# Altium PCB EMG_MainBoard_Layout.PcbDoc (part 5 of 5)
Units mm, origin at the board's own origin, x right, y up, seen from the top; angles counter-clockwise.
Board outline 80 x 45 mm, 4 copper layers (L1 TOP, L2 GND, L3 POWER SIGNAL, L4 BOTTOM GND), stack 1.164 mm thick; 231 components, 136 nets, 808 pads, 48 vias.
Unrouted connection lines stored in the file: 570.
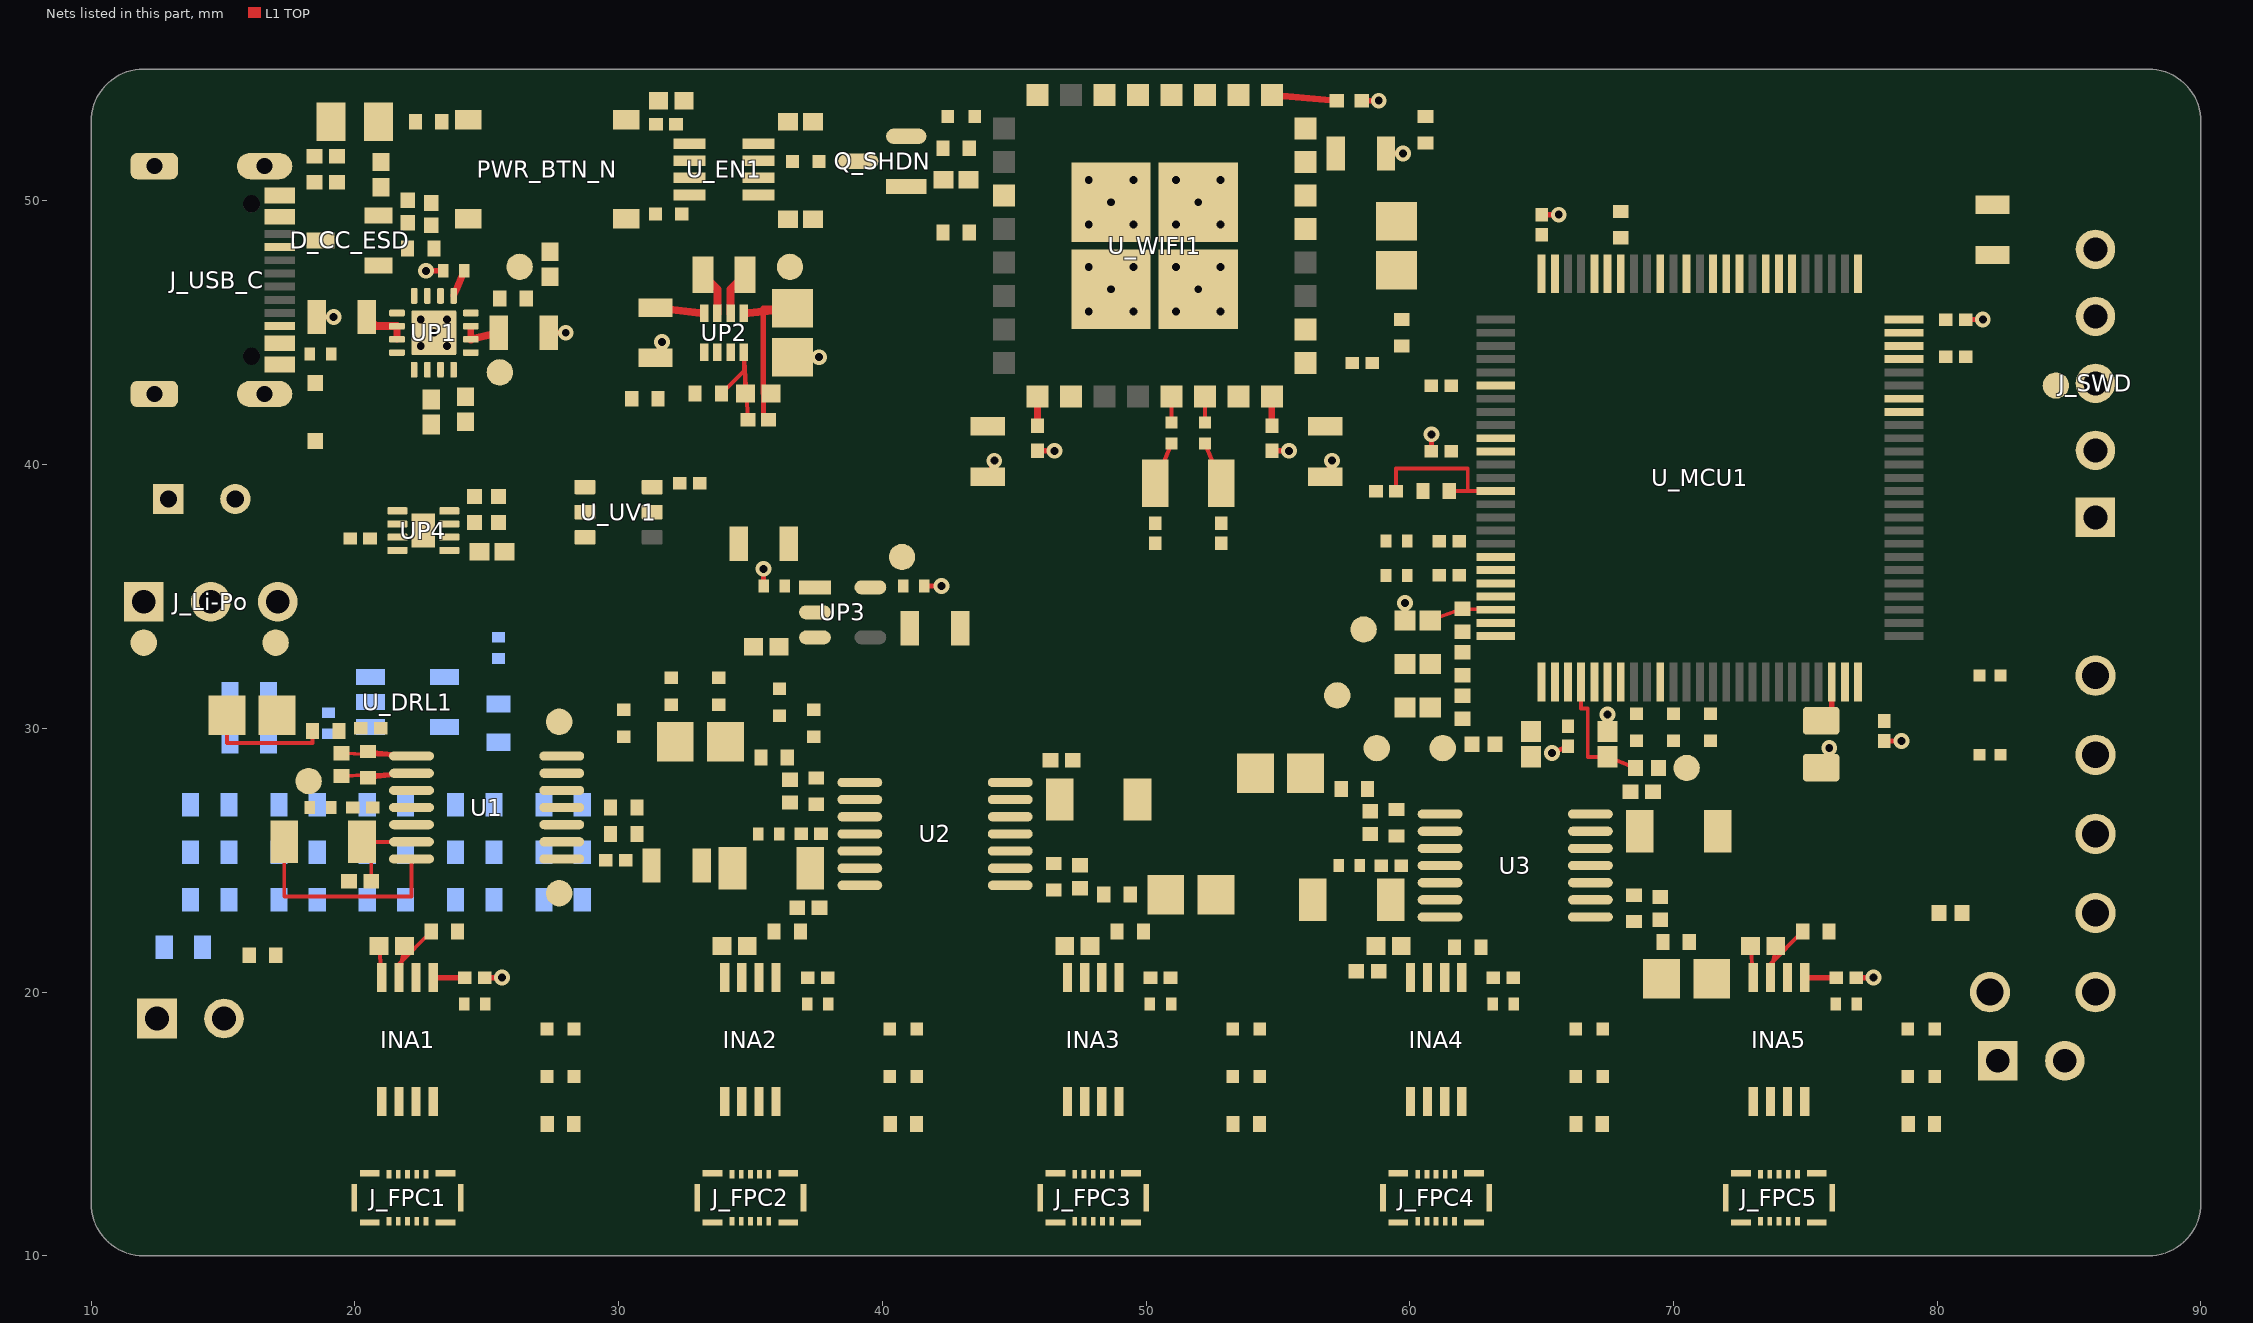
[diagram p4: the nets of this part, all layers, seen from the top]

## Via types
v1: diameter 0.6, hole 0.3, L1 TOP to L4 BOTTOM GND, 31 vias
v2: diameter 0.6, hole 0.3, L1 TOP to L4 BOTTOM GND, tented top, 12 vias
v3: diameter 0.5, hole 0.3, L1 TOP to L4 BOTTOM GND, 5 vias

## Nets (pads, with @x,y where several pads share a name; then routed paths per layer and width w, separated by ;. In a path a pad name is that pad's centre, name@x,y a point inside that pad or via, vN(x,y) a via of type N, cw(c..) or ccw(c..) an arc to the next point about the centre after c; other vN are vias at no path point) (continued)
INA_OUT_1: CL_1.2 INA1.8 RH_1.1 Rservo_1.2 | length 1.2
  L1 TOP w0.15: RH_1.1@20.921,21.75 INA1.8@21.025,20.55
INA_OUT_2: CL_2.2 INA2.8 RH_2.1 Rservo_2.2
INA_OUT_3: CL_3.2 INA3.8 RH_3.1 Rservo_3.2
INA_OUT_4: CL_4.2 INA4.8 RH_4.1 Rservo_4.2
INA_OUT_5: CL_5.2 INA5.8 RH_5.1 Rservo_5.2 | length 1.2
  L1 TOP w0.15: RH_5.1@72.921,21.75 INA5.8@73.025,20.55
KILL_CTRL: Q_SHDN.3 R_KILL_PU.1 U_EN1.8
MCU_BOOT0: R_MCU_BOOT0_PD.2 TP_MCU_BOOT0.TP U_MCU1.94
MCU_NRST: C_NRST.1 J_SWD.5 R_NRST.1 U_MCU1.14 | length 7.2
  L1 TOP w0.15: C_NRST.1@59.479,39 59.479,39.85 62.2,39.85 62.2,39 U_MCU1.14@63.262,39 R_NRST.1@61.5,39
MCU_PWR_INT_N: R_INT_PULLUP.2 U_EN1.5 U_MCU1.83
MCU_SHUTDOWN: R_SHDN_G.2 U_MCU1.86
MCU_SPI_MISO: R_SPI_MISO.2 U_MCU1.31
MCU_SPI_MOSI: R_SPI_MOSI.2 U_MCU1.32
MCU_SPI_SCK: R_SPI_SCK.2 U_MCU1.30
MCU_SWCLK: J_SWD.4 U_MCU1.76
MCU_SWDIO: J_SWD.2 U_MCU1.72
MCU_VCAP: MCU_VCAP.2 U_MCU1.48 | length 1.6
  L1 TOP w0.2: MCU_VCAP.2@75.6,30.288 76,30.688 U_MCU1.48@76,31.762
MCU_WIFI_CS: R_SPI_CS.2 U_MCU1.35
MCU_WIFI_UART_RX: R_WIFI_UART_RX_LINK.2 U_MCU1.69
MCU_WIFI_UART_TX: R_WIFI_UART_TX_LINK.2 U_MCU1.68
NetC1_EN1_2: C1_EN1.2 R_EN1_1.2 U_EN1.1
NetC2_EN1_1: C2_EN1.1 U_EN1.3
NetC3_EN1_2: C3_EN1.2 U_EN1.7
NetC_WIFI_X32_IN_2: C_WIFI_X32_IN.2 R_WIFI_X32_IN.1 X_WIFI_32K.1 | length 1.6
  L1 TOP w0.15: R_WIFI_X32_IN.1@52.235,40.8 X_WIFI_32K.1@52.85,39.3
NetC_WIFI_X32_OUT_2: C_WIFI_X32_OUT.2 R_WIFI_X32_OUT.1 X_WIFI_32K.2 | length 1.6
  L1 TOP w0.15: X_WIFI_32K.2@50.35,39.3 R_WIFI_X32_OUT.1@50.965,40.8
NetCH_1_2: CH_1.2 RG_1.1 RGN_1.2 U1.2 | length 4.3
  L1 TOP w0.15: CH_1.2@19.5,28.193 U1.2@22.15,28.3 RG_1.1@20.5,28.125
NetCH_2_2: CH_2.2 RG_2.1 RGN_2.2 U2.2
NetCH_3_2: CH_3.2 RG_3.1 RGN_3.2 U2.9
NetCH_4_2: CH_4.2 RG_4.1 RGN_4.2 U3.2
NetCH_5_2: CH_5.2 RG_5.1 RGN_5.2 U3.9
NetCL_1_1: CL_1.1 RGN_1.1 | length 4.7
  L1 TOP w0.15: CL_1.1@15.15,30.5 15.15,29.45 18.4,29.45 RGN_1.1@18.4,29.9
NetCL_2_1: CL_2.1 RGN_2.1
NetCL_3_1: CL_3.1 RGN_3.1
NetCL_4_1: CL_4.1 RGN_4.1
NetCL_5_1: CL_5.1 RGN_5.1
NetCservo_1_1: Cservo_1.1 Rservo_1.1 U1.6 | length 4.9
  L1 TOP w0.15: Cservo_1.1@20.275,25.7 U1.6@22.15,25.7 20.625,25.7 Rservo_1.1@20.625,24.2
NetCservo_2_1: Cservo_2.1 Rservo_2.1 U2.6
NetCservo_3_1: Cservo_3.1 Rservo_3.1 U2.13
NetCservo_4_1: Cservo_4.1 Rservo_4.1 U3.6
NetCservo_5_1: Cservo_5.1 Rservo_5.1 U3.13
NetCUP4_FB_1: CUP4_FB.1 RUP_3.1 RUP_4.2 UP2.8 | length 6.1
  L1 TOP w0.15: RUP_4.2@33.9,42.7 34.75,43.55 UP2.8@34.75,44.265 ; RUP_3.1@34.821,42.7 UP2.8@34.75,44.265 ; CUP4_FB.1@34.91,41.7 UP2.8@34.75,44.265
NetD_CC_ESD_1: D_CC_ESD.1 J_USB_C.A5 RJ1.2
NetD_CC_ESD_2: D_CC_ESD.2 J_USB_C.B5 RJ2.2
NetINA1_2: INA1.2 RDD2.2
NetINA1_3: INA1.3 RDD1.2 RDD3.2
NetINA1_7: INA1.7 RH_1.2 RL_1.1 | length 3.5
  L1 TOP w0.15: RH_1.2@21.879,21.75 INA1.7@21.675,20.55 21.675,21.075 RL_1.1@22.9,22.3
NetINA2_2: INA2.2 RDD5.2
NetINA2_3: INA2.3 RDD4.2 RDD6.2
NetINA2_7: INA2.7 RH_2.2 RL_2.1
NetINA3_2: INA3.2 RDD8.2
NetINA3_3: INA3.3 RDD7.2 RDD9.2
NetINA3_7: INA3.7 RH_3.2 RL_3.1
NetINA4_2: INA4.2 RDD11.2
NetINA4_3: INA4.3 RDD10.2 RDD12.2
NetINA4_7: INA4.7 RH_4.2 RL_4.1
NetINA5_2: INA5.2 RDD14.2
NetINA5_3: INA5.3 RDD13.2 RDD15.2
NetINA5_7: INA5.7 RH_5.2 RL_5.1 | length 3.5
  L1 TOP w0.15: RH_5.2@73.879,21.75 INA5.7@73.675,20.55 73.675,21.075 RL_5.1@74.9,22.3
NetJ_FPC1_8: J_FPC1.8 R_VREF1.2
NetJ_FPC2_8: J_FPC2.8 R_VREF2.2
NetJ_FPC3_8: J_FPC3.8 R_VREF3.2
NetJ_FPC4_8: J_FPC4.8 R_VREF4.2
NetJ_FPC5_8: J_FPC5.8 R_VREF5.2
NetJ_REF_1: J_REF.1 J_REF.2 R_DRL_SEL.2 R_ref.1
NetJP_WIFI_BOOT_1: JP_WIFI_BOOT.1 R_WIFI_BOOT_OVR.2
NetL1_1: L1.1 UP2.3 | length 1.7
  L1 TOP w0.3: L1.1@33.2,47.2 33.75,46.65 UP2.3@33.75,45.735
NetL1_2: L1.2 UP2.2 | length 1.7
  L1 TOP w0.3: UP2.2@34.25,45.735 34.25,46.65 L1.2@34.8,47.2
NetLED_CHG_A: LED_CHG.A R_CHG_LED.2
NetLED_CHG_C: LED_CHG.C UP1.9
NetPWR_BTN_N_A: PWR_BTN_N.A PWR_BTN_N.B U_EN1.2
NetQ_SHDN_1: Q_SHDN.1 R_SHDN_G.1 R_SHDN_PD.2
NetR_EN1_BIAS_2: R_EN1_BIAS.2 UP1.6
NetR_LIM_2: R_LIM.2 UP1.12
NetR_TMR_2: R_TMR.2 UP1.14
NetRISET_1: RISET.1 UP1.16
SYS_EN: R_EN.2 U_EN1.6 U_UV1.1 UP2.5
TS: R_TS_SER.2 UP1.1
USB_PGOOD_N: R_PGOOD.1 U_MCU1.82 UP1.7
Va_1: J_FPC1.2 R_DRL_VA1.1 RDD1.1
Va_2: J_FPC2.2 R_DRL_VA2.1 RDD4.1
Va_3: J_FPC3.2 R_DRL_VA3.1 RDD7.1
Va_4: J_FPC4.2 R_DRL_VA4.1 RDD10.1
Va_5: J_FPC5.2 R_DRL_VA5.1 RDD13.1
Vb_1: J_FPC1.4 R_DRL_VB1.1 RDD2.1
Vb_2: J_FPC2.4 R_DRL_VB2.1 RDD5.1
Vb_3: J_FPC3.4 R_DRL_VB3.1 RDD8.1
Vb_4: J_FPC4.4 R_DRL_VB4.1 RDD11.1
Vb_5: J_FPC5.4 R_DRL_VB5.1 RDD14.1
VBAT_CELL: C_BAT.1 CU6_1.2 J_Li-Po.3 pad.TP_VBAT_CELL UP1.2 UP1.3 UP4.2 UP4.3 | length 1.8
  L1 TOP w0.25: UP1.3@21.6,44.75 UP1.2@21.6,45.25
  L1 TOP w0.3: C_BAT.1@20.45,45.6 20.8,45.25 UP1.2@21.6,45.25
VBUS: C_IN_.1 C_VBUS.2 D_VBUS.1 J_USB_C.A4_B9 J_USB_C.B4_A9 pad.TP_VBUS R_TS_TOP.2 UP1.13 | length 1
  L1 TOP w0.25: UP1.13@23.75,46.4 23.883,46.717 24.017,47.033 C_IN_.1@24.15,47.35
Vc_1: J_FPC1.6 R_DRL_VC1.1 RDD3.1
Vc_2: J_FPC2.6 R_DRL_VC2.1 RDD6.1
Vc_3: J_FPC3.6 R_DRL_VC3.1 RDD9.1
Vc_4: J_FPC4.6 R_DRL_VC4.1 RDD12.1
Vc_5: J_FPC5.6 R_DRL_VC5.1 RDD15.1
VDiv: Cdiv_1.2 Cdiv_10uF.2 RV1.1 RV2.2 U1.10 U1.12
VOUT_1: CH_1.1 pad.TP_VOUT_1 R_ADC1.1 RG_1.2 U1.1 | length 4.3
  L1 TOP w0.15: CH_1.1@19.5,29.057 U1.1@22.15,28.95 RG_1.2@20.5,29.125
VOUT_2: CH_2.1 pad.TP_VOUT_2 R_ADC2.1 RG_2.2 U2.1
VOUT_3: CH_3.1 pad.TP_VOUT_3 R_ADC3.1 RG_3.2 U2.8
VOUT_4: CH_4.1 pad.TP_VOUT_4 R_ADC4.1 RG_4.2 U3.1
VOUT_5: CH_5.1 pad.TP_VOUT_5 R_ADC5.1 RG_5.2 U3.8
VREF_A: pad.TP_VREF_A RL_1.2 RL_2.2 RL_3.2 RL_4.2 RL_5.2 U1.3 U1.5 U1.8 U1.9 U2.3 U2.5 U2.10 U2.12 U3.3 U3.5 U3.10 U3.12
VREF_B_SRC: pad.TP_VREF_B_SRC R_ref.2 R_VREF1.1 R_VREF2.1 R_VREF3.1 R_VREF4.1 R_VREF5.1 U1.13 U1.14 U_DRL1.3
Vservo_1: Cservo_1.2 INA1.6 U1.7 | length 8.3
  L1 TOP w0.15: Cservo_1.2@17.325,25.7 17.325,23.625 22.15,23.625 U1.7@22.15,25.05
Vservo_2: Cservo_2.2 INA2.6 U2.7
Vservo_3: Cservo_3.2 INA3.6 U2.14
Vservo_4: Cservo_4.2 INA4.6 U3.7
Vservo_5: Cservo_5.2 INA5.6 U3.14
VSYS: C_OUT_.1 C_UV_BYPASS.1 CUP4_1.1 pad.TP_VSYS R_CHG_LED.1 R_EN1_1.1 R_EN1_BIAS.1 R_EN.1 U_UV1.3 U_UV1.5 U_UV1.6 UP1.10 UP1.11 UP2.4 | length 3.4
  L1 TOP w0.25: UP1.10@24.4,44.75 UP1.11@24.4,45.25
  L1 TOP w0.3: UP1.10@24.4,44.75 C_OUT_.1@25.45,45 ; CUP4_1.1@31.4,45.95 UP2.4@33.25,45.735
WIFI_BOOT: JP_WIFI_BOOT.2 R_WIFI_BOOT_PD.2 TP_WIFI_BOOT.TP U_MCU1.91 U_WIFI1.3
WIFI_CHIP_EN: C_WIFI_EN.1 R_WIFI_EN_PD.1 TP_WIFI_CHIP_EN.TP U_MCU1.87 U_WIFI1.17
WIFI_SPI_CLK: R_SPI_SCK.1 U_WIFI1.28
WIFI_SPI_CS: R_SPI_CS.1 R_WIFI_CS_PD.1 U_WIFI1.24
WIFI_SPI_MISO: R_SPI_MISO.1 U_WIFI1.29
WIFI_SPI_MOSI: R_SPI_MOSI.1 U_WIFI1.27
WIFI_SPI_RDY: U_MCU1.89 U_WIFI1.21
WIFI_UART_RX: R_WIFI_UART_TX_LINK.1 TP_WIFI_UART_RX.TP U_WIFI1.23
WIFI_UART_TX: R_WIFI_UART_RX_LINK.1 TP_WIFI_UART_TX.TP U_WIFI1.22
WIFI_X32_RAW_IN: R_WIFI_X32_IN.2 U_WIFI1.14 | length 1
  L1 TOP w0.15: R_WIFI_X32_IN.2@52.235,41.6 U_WIFI1.14@52.235,42.584
WIFI_X32_RAW_OUT: R_WIFI_X32_OUT.2 U_WIFI1.13 | length 1
  L1 TOP w0.15: R_WIFI_X32_OUT.2@50.965,41.6 U_WIFI1.13@50.965,42.584
pads on no net: J_USB_C. J_USB_C.A6 J_USB_C.A7 J_USB_C.A8 J_USB_C.B6 J_USB_C.B7 J_USB_C.B8 U_MCU1.1 U_MCU1.2 U_MCU1.3 U_MCU1.4 U_MCU1.5 U_MCU1.7 U_MCU1.8 U_MCU1.9 U_MCU1.12 U_MCU1.13 U_MCU1.15 U_MCU1.16 U_MCU1.17 U_MCU1.18 U_MCU1.33 U_MCU1.34 U_MCU1.36 U_MCU1.37 U_MCU1.38 U_MCU1.39 U_MCU1.40 U_MCU1.41 U_MCU1.42 U_MCU1.43 U_MCU1.44 U_MCU1.45 U_MCU1.46 U_MCU1.47 U_MCU1.51 U_MCU1.52 U_MCU1.53 U_MCU1.54 U_MCU1.55 U_MCU1.56 U_MCU1.57 U_MCU1.58 U_MCU1.59 U_MCU1.60 U_MCU1.61 U_MCU1.62 U_MCU1.63 U_MCU1.64 U_MCU1.65 U_MCU1.66 U_MCU1.67 U_MCU1.70 U_MCU1.71 U_MCU1.77 U_MCU1.78 U_MCU1.79 U_MCU1.80 U_MCU1.84 U_MCU1.88 U_MCU1.90 U_MCU1.92 U_MCU1.93 U_MCU1.97 U_MCU1.98 U_UV1.4 U_WIFI1.1 U_WIFI1.2 U_WIFI1.4 U_WIFI1.5 U_WIFI1.6 U_WIFI1.7 U_WIFI1.8 U_WIFI1.11 U_WIFI1.12 U_WIFI1.19 U_WIFI1.20 U_WIFI1.31 UP1.17@23,45 UP3.4

## Polygon pours and split planes (outlines as drawn)
GND on L2 GND "EMG_L2_COMMON_GND" (solid, remove dead copper, pour order 0): 12,10.5 88,10.5 ccw(c88,12) 89.5,12 89.5,53 ccw(c88,53) 88,54.5 12,54.5 ccw(c12,53) 10.5,53 10.5,12 ccw(c12,12)
GND on L4 BOTTOM GND "EMG_L4_COMMON_GND" (solid, remove dead copper, pour order 1): 12,10.5 88,10.5 ccw(c88,12) 89.5,12 89.5,53 ccw(c88,53) 88,54.5 12,54.5 ccw(c12,53) 10.5,53 10.5,12 ccw(c12,12)

## Keep-outs
Keep-Out Layer:
  region: 44.19,54.44 56.47,54.44 56.47,59.44 44.19,59.44

## Silkscreen, mask and mechanical layers (free items; w line width, h text height)
Mechanical 4:
  lines w0.08: 21.3,13.087 21.3,14.2 ; 22,6 22,11.1 ; 34.3,13.087 34.3,14.2 ; 35,6 35,11.1 ; 47.3,13.087 47.3,14.2 ; 48,6 48,11.1 ; 60.3,13.087 60.3,14.2 ; 61,6 61,11.1 ; 73.3,13.087 73.3,14.2 ; 74,6 74,11.1
  text "COMMON GND - NO AGND / DGND SPLIT" at 33,63 h0.65
  text "ANTENNA: NO COPPER / VIAS / METAL / BATTERY" at 32,61 h0.65
  text "REMOTE NTC: ONE 103AT-2 ON CELL; P1 GND / P2 BAT_TEMP" at 10,57 h0.65
  text "SWD 1 VTREF / 2 IO / 3 GND / 4 CLK / 5 NRST" at 92,42 h0.65
  text "SIG1" at 19.4,14.4 h0.65
  text "SIG1" at 32.4,14.4 h0.65
  text "SIG1" at 45.4,14.4 h0.65
  text "SIG1" at 58.4,14.4 h0.65
  text "SIG1" at 71.4,14.4 h0.65
  text "CH1 / MAIN END" at 19,8 h0.65
  text "CH2 / MAIN END" at 32,8 h0.65
  text "CH3 / MAIN END" at 45,8 h0.65
  text "CH4 / MAIN END" at 58,8 h0.65
  text "CH5 / MAIN END" at 71,8 h0.65
  text "FLEX FOLD / KEYING / TOOL ENVELOPES TBD - DO NOT REVERSE" at 14,4 h0.65
  text "TRIAL 80 x 45 mm / R2 - NOT FABRICATION RELEASE" at 31,2 h0.65
Top Assembly:
  drawing of 157 lines, arcs and shapes, not listed

## Text inside footprints (layer, text, board x,y; h text height)
J_USB_C: Top 3D Body "PCB EDGE" at 9.9,41.6 h0.41 r270